# Altium PCB PCB_CONTROL.PcbDoc (part 11 of 15)
Units mil, origin at the board's own origin, x right, y up, seen from the top; angles counter-clockwise.
Board outline 7360.03 x 4773.15 mil, 2 copper layers (Top Layer, Bottom Layer); 73 components, 135 nets, 396 pads, 106 vias.
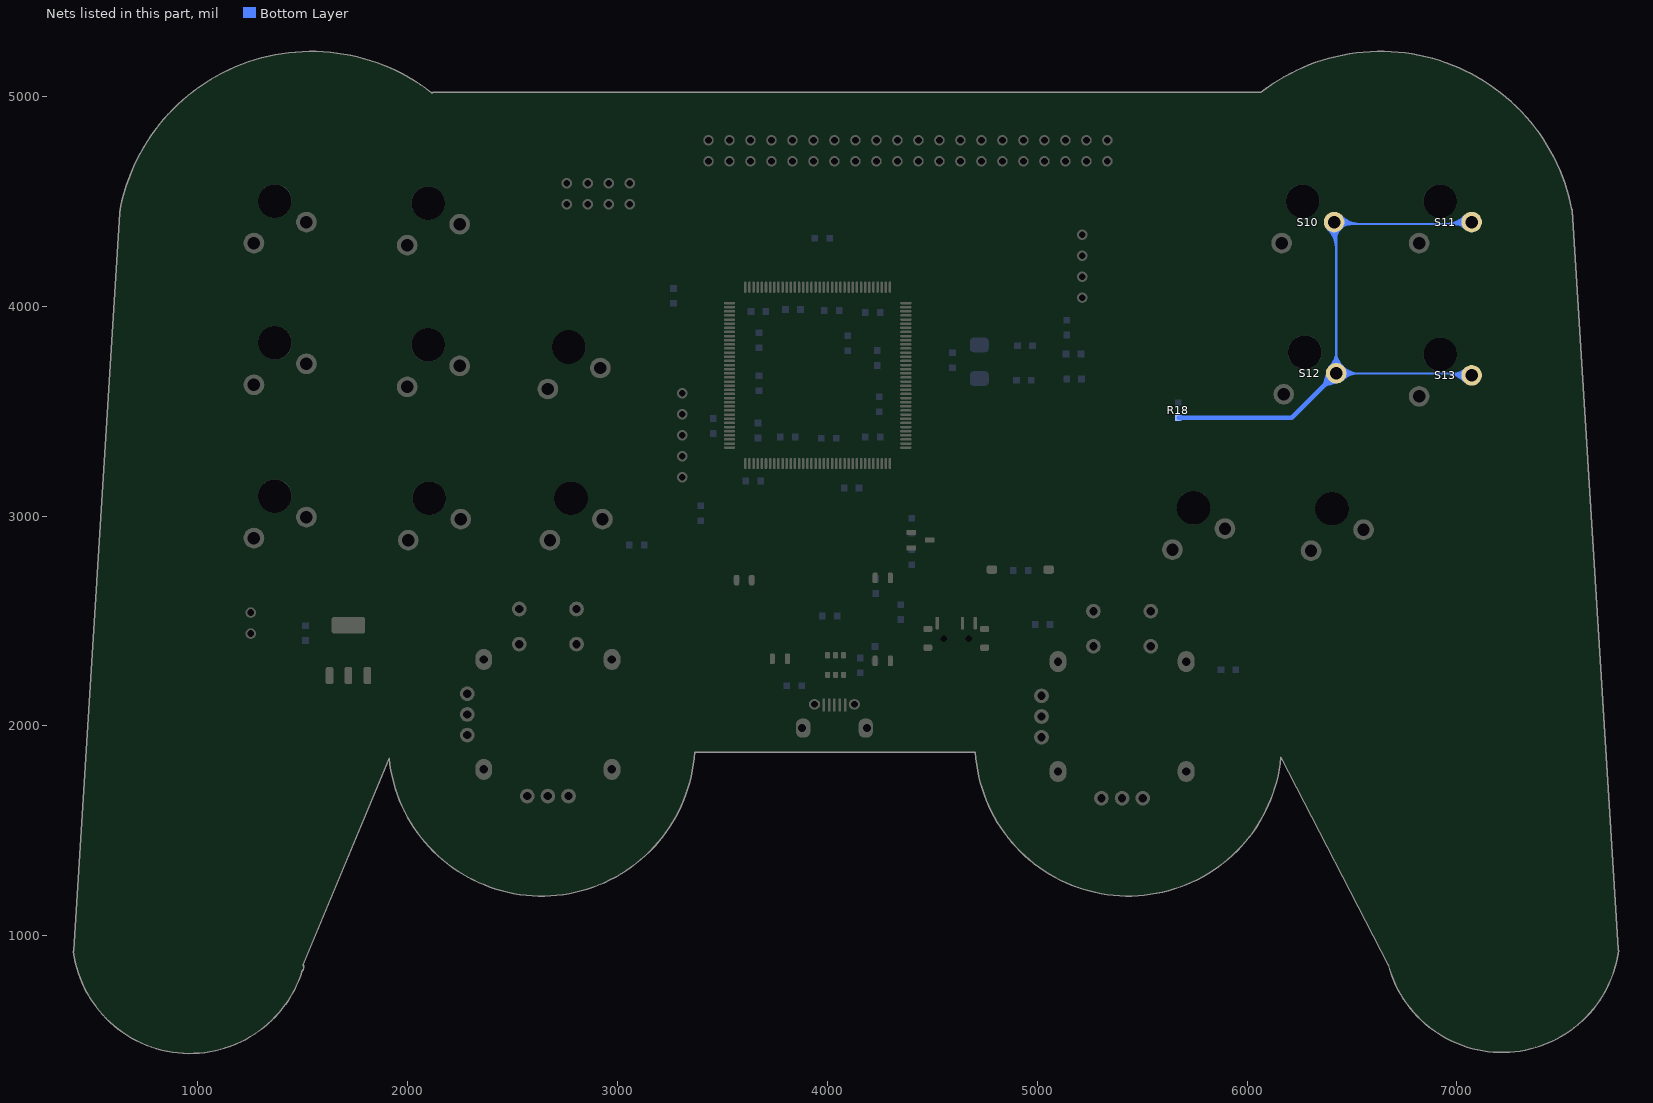
[diagram p11: the nets of this part, all layers, seen from the top]

## Via types
v1: diameter 20, hole 10, Top Layer to Bottom Layer, 104 vias
v2: diameter 30, hole 20, Top Layer to Bottom Layer, 2 vias

## Nets (pads, with @x,y where several pads share a name; then routed paths per layer and width w, separated by ;. In a path a pad name is that pad's centre, name@x,y a point inside that pad or via, vN(x,y) a via of type N, cw(c..) or ccw(c..) an arc to the next point about the centre after c; other vN are vias at no path point) (continued)
NetR18_1: R18.1 S10.1 S11.1 S12.1 S13.1 | length 30198
  Bottom Layer w10: R18.1@5680.78,3460.22 cw(c5699.56,3441.44) 5699.56,3468 cw(c5699.56,3494.56) R18.1@5680.78,3475.78 ; S12.1@6380.79,3680 cw(c6274.05,3680) 6349.52,3604.52 cw(c6425,3529.05) S12.1@6425,3635.79 ; S12.1@6390.79,3680 cw(c6308.19,3680) 6366.6,3621.6 cw(c6425,3563.19) S12.1@6425,3645.79 ; S12.1@6400.79,3680 cw(c6342.33,3680) 6383.67,3638.67 cw(c6425,3597.33) S12.1@6425,3655.79 ; S11.1@7060,4390 6425,4390 S12.1@6425,3680 6426,3679 S13.1@7061,3679 ; 6368.29,3633.34 cw(c6438.4,3614.56) S12.1@6423.84,3685.67 ; 6368.29,3633.34 cw(c6438.4,3614.56) S12.1@6423.84,3685.67 ; 6368.29,3633.34 cw(c6438.4,3614.56) S12.1@6423.84,3685.67 ; 6368.29,3633.34 cw(c6438.4,3614.56) S12.1@6423.84,3685.67 ; 6368.29,3633.34 cw(c6438.4,3614.56) S12.1@6423.84,3685.67 ; 6368.29,3633.34 cw(c6438.4,3614.56) S12.1@6423.84,3685.67 ; 6368.29,3633.34 cw(c6438.4,3614.56) S12.1@6423.84,3685.67 ; 6372.47,3648.98 cw(c6434.77,3632.28) S12.1@6421.83,3695.47 ; 6372.47,3648.98 cw(c6434.77,3632.28) S12.1@6421.83,3695.47 ; 6372.47,3648.98 cw(c6434.77,3632.28) S12.1@6421.83,3695.47 ; 6372.47,3648.98 cw(c6434.77,3632.28) S12.1@6421.83,3695.47 ; 6372.47,3648.98 cw(c6434.77,3632.28) S12.1@6421.83,3695.47 ; 6372.47,3648.98 cw(c6434.77,3632.28) S12.1@6421.83,3695.47 ; 6372.47,3648.98 cw(c6434.77,3632.28) S12.1@6421.83,3695.47 ; 6376.66,3664.61 cw(c6431.14,3650.01) S12.1@6419.83,3705.26 ; 6376.66,3664.61 cw(c6431.14,3650.01) S12.1@6419.83,3705.26 ; 6376.66,3664.61 cw(c6431.14,3650.01) S12.1@6419.83,3705.26 ; 6376.66,3664.61 cw(c6431.14,3650.01) S12.1@6419.83,3705.26 ; 6376.66,3664.61 cw(c6431.14,3650.01) S12.1@6419.83,3705.26 ; 6376.66,3664.61 cw(c6431.14,3650.01) S12.1@6419.83,3705.26 ; 6376.66,3664.61 cw(c6431.14,3650.01) S12.1@6419.83,3705.26 ; 6378.34,3623.29 ccw(c6359.56,3693.4) S12.1@6430.67,3678.84 ; 6378.34,3623.29 ccw(c6359.56,3693.4) S12.1@6430.67,3678.84 ; 6378.34,3623.29 ccw(c6359.56,3693.4) S12.1@6430.67,3678.84 ; 6378.34,3623.29 ccw(c6359.56,3693.4) S12.1@6430.67,3678.84 ; 6378.34,3623.29 ccw(c6359.56,3693.4) S12.1@6430.67,3678.84 ; 6378.34,3623.29 ccw(c6359.56,3693.4) S12.1@6430.67,3678.84 ; 6378.34,3623.29 ccw(c6359.56,3693.4) S12.1@6430.67,3678.84 ; S10.1@6383.74,4368.74 cw(c6284.12,4269.12) 6425,4269.12 ; S10.1@6383.74,4368.74 cw(c6284.12,4269.12) 6425,4269.12 ; S10.1@6383.74,4368.74 cw(c6284.12,4269.12) 6425,4269.12 ; S10.1@6383.74,4368.74 cw(c6284.12,4269.12) 6425,4269.12 ; S10.1@6383.74,4368.74 cw(c6284.12,4269.12) 6425,4269.12 ; S10.1@6383.74,4368.74 cw(c6284.12,4269.12) 6425,4269.12 ; S10.1@6383.74,4368.74 cw(c6284.12,4269.12) 6425,4269.12 ; S10.1@6383.74,4368.74 cw(c6284.12,4269.12) 6425,4269.12 ; S10.1@6390.81,4375.81 cw(c6308.26,4293.26) 6425,4293.26 ; S10.1@6390.81,4375.81 cw(c6308.26,4293.26) 6425,4293.26 ; S10.1@6390.81,4375.81 cw(c6308.26,4293.26) 6425,4293.26 ; S10.1@6390.81,4375.81 cw(c6308.26,4293.26) 6425,4293.26 ; S10.1@6390.81,4375.81 cw(c6308.26,4293.26) 6425,4293.26 ; S10.1@6390.81,4375.81 cw(c6308.26,4293.26) 6425,4293.26 ; S10.1@6390.81,4375.81 cw(c6308.26,4293.26) 6425,4293.26 ; S10.1@6390.81,4375.81 cw(c6308.26,4293.26) 6425,4293.26 ; S12.1@6393.74,3711.26 ccw(c6318.26,3786.74) 6425,3786.74 ; S12.1@6393.74,3711.26 ccw(c6318.26,3786.74) 6425,3786.74 ; S12.1@6393.74,3711.26 ccw(c6318.26,3786.74) 6425,3786.74 ; S12.1@6393.74,3711.26 ccw(c6318.26,3786.74) 6425,3786.74 ; S12.1@6393.74,3711.26 ccw(c6318.26,3786.74) 6425,3786.74 ; S12.1@6393.74,3711.26 ccw(c6318.26,3786.74) 6425,3786.74 ; S12.1@6393.74,3711.26 ccw(c6318.26,3786.74) 6425,3786.74 ; S12.1@6393.74,3711.26 ccw(c6318.26,3786.74) 6425,3786.74 ; 6393.98,3627.47 ccw(c6377.28,3689.77) S12.1@6440.47,3676.83 ; 6393.98,3627.47 ccw(c6377.28,3689.77) S12.1@6440.47,3676.83 ; 6393.98,3627.47 ccw(c6377.28,3689.77) S12.1@6440.47,3676.83 ; 6393.98,3627.47 ccw(c6377.28,3689.77) S12.1@6440.47,3676.83 ; 6393.98,3627.47 ccw(c6377.28,3689.77) S12.1@6440.47,3676.83 ; 6393.98,3627.47 ccw(c6377.28,3689.77) S12.1@6440.47,3676.83 ; 6393.98,3627.47 ccw(c6377.28,3689.77) S12.1@6440.47,3676.83 ; S10.1@6397.88,4382.88 cw(c6332.4,4317.4) 6425,4317.4 ; S10.1@6397.88,4382.88 cw(c6332.4,4317.4) 6425,4317.4 ; S10.1@6397.88,4382.88 cw(c6332.4,4317.4) 6425,4317.4 ; S10.1@6397.88,4382.88 cw(c6332.4,4317.4) 6425,4317.4 ; S10.1@6397.88,4382.88 cw(c6332.4,4317.4) 6425,4317.4 ; S10.1@6397.88,4382.88 cw(c6332.4,4317.4) 6425,4317.4 ; S10.1@6397.88,4382.88 cw(c6332.4,4317.4) 6425,4317.4 ; S10.1@6397.88,4382.88 cw(c6332.4,4317.4) 6425,4317.4 ; S12.1@6400.81,3704.19 ccw(c6342.4,3762.6) 6425,3762.6 ; S12.1@6400.81,3704.19 ccw(c6342.4,3762.6) 6425,3762.6 ; S12.1@6400.81,3704.19 ccw(c6342.4,3762.6) 6425,3762.6 ; S12.1@6400.81,3704.19 ccw(c6342.4,3762.6) 6425,3762.6 ; S12.1@6400.81,3704.19 ccw(c6342.4,3762.6) 6425,3762.6 ; S12.1@6400.81,3704.19 ccw(c6342.4,3762.6) 6425,3762.6 ; S12.1@6400.81,3704.19 ccw(c6342.4,3762.6) 6425,3762.6 ; S12.1@6400.81,3704.19 ccw(c6342.4,3762.6) 6425,3762.6 ; S10.1@6404.95,4389.95 cw(c6356.55,4341.55) 6425,4341.55 ; S10.1@6404.95,4389.95 cw(c6356.55,4341.55) 6425,4341.55 ; S10.1@6404.95,4389.95 cw(c6356.55,4341.55) 6425,4341.55 ; S10.1@6404.95,4389.95 cw(c6356.55,4341.55) 6425,4341.55 ; S10.1@6404.95,4389.95 cw(c6356.55,4341.55) 6425,4341.55 ; S10.1@6404.95,4389.95 cw(c6356.55,4341.55) 6425,4341.55 ; S10.1@6404.95,4389.95 cw(c6356.55,4341.55) 6425,4341.55 ; S10.1@6404.95,4389.95 cw(c6356.55,4341.55) 6425,4341.55 ; S12.1@6407.88,3697.12 ccw(c6366.55,3738.45) 6425,3738.45 ; S12.1@6407.88,3697.12 ccw(c6366.55,3738.45) 6425,3738.45 ; S12.1@6407.88,3697.12 ccw(c6366.55,3738.45) 6425,3738.45 ; S12.1@6407.88,3697.12 ccw(c6366.55,3738.45) 6425,3738.45 ; S12.1@6407.88,3697.12 ccw(c6366.55,3738.45) 6425,3738.45 ; S12.1@6407.88,3697.12 ccw(c6366.55,3738.45) 6425,3738.45 ; S12.1@6407.88,3697.12 ccw(c6366.55,3738.45) 6425,3738.45 ; S12.1@6407.88,3697.12 ccw(c6366.55,3738.45) 6425,3738.45 ; 6409.61,3631.66 ccw(c6395.01,3686.14) S12.1@6450.26,3674.83 ; 6409.61,3631.66 ccw(c6395.01,3686.14) S12.1@6450.26,3674.83 ; 6409.61,3631.66 ccw(c6395.01,3686.14) S12.1@6450.26,3674.83 ; 6409.61,3631.66 ccw(c6395.01,3686.14) S12.1@6450.26,3674.83 ; 6409.61,3631.66 ccw(c6395.01,3686.14) S12.1@6450.26,3674.83 ; 6409.61,3631.66 ccw(c6395.01,3686.14) S12.1@6450.26,3674.83 ; 6409.61,3631.66 ccw(c6395.01,3686.14) S12.1@6450.26,3674.83 ; 6425,3738.45 ccw(c6483.45,3738.45) S12.1@6442.12,3697.12 ; 6425,3738.45 ccw(c6483.45,3738.45) S12.1@6442.12,3697.12 ; 6425,3738.45 ccw(c6483.45,3738.45) S12.1@6442.12,3697.12 ; 6425,3738.45 ccw(c6483.45,3738.45) S12.1@6442.12,3697.12 ; 6425,3738.45 ccw(c6483.45,3738.45) S12.1@6442.12,3697.12 ; 6425,3738.45 ccw(c6483.45,3738.45) S12.1@6442.12,3697.12 ; 6425,3738.45 ccw(c6483.45,3738.45) S12.1@6442.12,3697.12 ; 6425,3738.45 ccw(c6483.45,3738.45) S12.1@6442.12,3697.12 ; 6425,3762.6 ccw(c6507.6,3762.6) S12.1@6449.19,3704.19 ; 6425,3762.6 ccw(c6507.6,3762.6) S12.1@6449.19,3704.19 ; 6425,3762.6 ccw(c6507.6,3762.6) S12.1@6449.19,3704.19 ; 6425,3762.6 ccw(c6507.6,3762.6) S12.1@6449.19,3704.19 ; 6425,3762.6 ccw(c6507.6,3762.6) S12.1@6449.19,3704.19 ; 6425,3762.6 ccw(c6507.6,3762.6) S12.1@6449.19,3704.19 ; 6425,3762.6 ccw(c6507.6,3762.6) S12.1@6449.19,3704.19 ; 6425,3762.6 ccw(c6507.6,3762.6) S12.1@6449.19,3704.19 ; 6425,3786.74 ccw(c6531.74,3786.74) S12.1@6456.26,3711.26 ; 6425,3786.74 ccw(c6531.74,3786.74) S12.1@6456.26,3711.26 ; 6425,3786.74 ccw(c6531.74,3786.74) S12.1@6456.26,3711.26 ; 6425,3786.74 ccw(c6531.74,3786.74) S12.1@6456.26,3711.26 ; 6425,3786.74 ccw(c6531.74,3786.74) S12.1@6456.26,3711.26 ; 6425,3786.74 ccw(c6531.74,3786.74) S12.1@6456.26,3711.26 ; 6425,3786.74 ccw(c6531.74,3786.74) S12.1@6456.26,3711.26 ; 6425,3786.74 ccw(c6531.74,3786.74) S12.1@6456.26,3711.26 ; 6425,4317.4 cw(c6497.6,4317.4) S10.1@6446.26,4368.74 ; 6425,4317.4 cw(c6497.6,4317.4) S10.1@6446.26,4368.74 ; 6425,4317.4 cw(c6497.6,4317.4) S10.1@6446.26,4368.74 ; 6425,4317.4 cw(c6497.6,4317.4) S10.1@6446.26,4368.74 ; 6425,4317.4 cw(c6497.6,4317.4) S10.1@6446.26,4368.74 ; 6425,4317.4 cw(c6497.6,4317.4) S10.1@6446.26,4368.74 ; 6425,4317.4 cw(c6497.6,4317.4) S10.1@6446.26,4368.74 ; 6425,4317.4 cw(c6497.6,4317.4) S10.1@6446.26,4368.74 ; 6425,4341.55 cw(c6473.45,4341.55) S10.1@6439.19,4375.81 ; 6425,4341.55 cw(c6473.45,4341.55) S10.1@6439.19,4375.81 ; 6425,4341.55 cw(c6473.45,4341.55) S10.1@6439.19,4375.81 ; 6425,4341.55 cw(c6473.45,4341.55) S10.1@6439.19,4375.81 ; 6425,4341.55 cw(c6473.45,4341.55) S10.1@6439.19,4375.81 ; 6425,4341.55 cw(c6473.45,4341.55) S10.1@6439.19,4375.81 ; 6425,4341.55 cw(c6473.45,4341.55) S10.1@6439.19,4375.81 ; 6425,4341.55 cw(c6473.45,4341.55) S10.1@6439.19,4375.81 ; S10.1@6425.05,4410.05 ccw(c6473.45,4458.45) 6473.45,4390 ; S10.1@6425.05,4410.05 ccw(c6473.45,4458.45) 6473.45,4390 ; S10.1@6425.05,4410.05 ccw(c6473.45,4458.45) 6473.45,4390 ; S10.1@6425.05,4410.05 ccw(c6473.45,4458.45) 6473.45,4390 ; S10.1@6425.05,4410.05 ccw(c6473.45,4458.45) 6473.45,4390 ; S10.1@6425.05,4410.05 ccw(c6473.45,4458.45) 6473.45,4390 ; S10.1@6425.05,4410.05 ccw(c6473.45,4458.45) 6473.45,4390 ; S10.1@6425.05,4410.05 ccw(c6473.45,4458.45) 6473.45,4390 ; S10.1@6432.12,4417.12 ccw(c6497.6,4482.6) 6497.6,4390 ; S10.1@6432.12,4417.12 ccw(c6497.6,4482.6) 6497.6,4390 ; S10.1@6432.12,4417.12 ccw(c6497.6,4482.6) 6497.6,4390 ; S10.1@6432.12,4417.12 ccw(c6497.6,4482.6) 6497.6,4390 ; S10.1@6432.12,4417.12 ccw(c6497.6,4482.6) 6497.6,4390 ; S10.1@6432.12,4417.12 ccw(c6497.6,4482.6) 6497.6,4390 ; S10.1@6432.12,4417.12 ccw(c6497.6,4482.6) 6497.6,4390 ; S10.1@6432.12,4417.12 ccw(c6497.6,4482.6) 6497.6,4390 ; S10.1@6439.19,4375.81 cw(c6473.45,4341.55) 6473.45,4390 ; S10.1@6439.19,4375.81 cw(c6473.45,4341.55) 6473.45,4390 ; S10.1@6439.19,4375.81 cw(c6473.45,4341.55) 6473.45,4390 ; S10.1@6439.19,4375.81 cw(c6473.45,4341.55) 6473.45,4390 ; S10.1@6439.19,4375.81 cw(c6473.45,4341.55) 6473.45,4390 ; S10.1@6439.19,4375.81 cw(c6473.45,4341.55) 6473.45,4390 ; S10.1@6439.19,4375.81 cw(c6473.45,4341.55) 6473.45,4390 ; S10.1@6439.19,4375.81 cw(c6473.45,4341.55) 6473.45,4390 ; S10.1@6439.19,4424.19 ccw(c6521.74,4506.74) 6521.74,4390 ; S10.1@6439.19,4424.19 ccw(c6521.74,4506.74) 6521.74,4390 ; S10.1@6439.19,4424.19 ccw(c6521.74,4506.74) 6521.74,4390 ; S10.1@6439.19,4424.19 ccw(c6521.74,4506.74) 6521.74,4390 ; S10.1@6439.19,4424.19 ccw(c6521.74,4506.74) 6521.74,4390 ; S10.1@6439.19,4424.19 ccw(c6521.74,4506.74) 6521.74,4390 ; S10.1@6439.19,4424.19 ccw(c6521.74,4506.74) 6521.74,4390 ; S10.1@6439.19,4424.19 ccw(c6521.74,4506.74) 6521.74,4390 ; S12.1@6442.12,3662.88 cw(c6481.04,3623.96) 6481.04,3679 ; S12.1@6442.12,3662.88 cw(c6481.04,3623.96) 6481.04,3679 ; S12.1@6442.12,3662.88 cw(c6481.04,3623.96) 6481.04,3679 ; S12.1@6442.12,3662.88 cw(c6481.04,3623.96) 6481.04,3679 ; S12.1@6442.12,3662.88 cw(c6481.04,3623.96) 6481.04,3679 ; S12.1@6442.12,3662.88 cw(c6481.04,3623.96) 6481.04,3679 ; S12.1@6442.12,3662.88 cw(c6481.04,3623.96) 6481.04,3679 ; S12.1@6442.12,3662.88 cw(c6481.04,3623.96) 6481.04,3679 ; S12.1@6442.12,3697.12 ccw(c6485.87,3740.87) 6485.87,3679 ; S12.1@6442.12,3697.12 ccw(c6485.87,3740.87) 6485.87,3679 ; S12.1@6442.12,3697.12 ccw(c6485.87,3740.87) 6485.87,3679 ; S12.1@6442.12,3697.12 ccw(c6485.87,3740.87) 6485.87,3679 ; S12.1@6442.12,3697.12 ccw(c6485.87,3740.87) 6485.87,3679 ; S12.1@6442.12,3697.12 ccw(c6485.87,3740.87) 6485.87,3679 ; S12.1@6442.12,3697.12 ccw(c6485.87,3740.87) 6485.87,3679 ; S12.1@6442.12,3697.12 ccw(c6485.87,3740.87) 6485.87,3679 ; S10.1@6446.26,4368.74 cw(c6497.6,4317.4) 6497.6,4390 ; S10.1@6446.26,4368.74 cw(c6497.6,4317.4) 6497.6,4390 ; S10.1@6446.26,4368.74 cw(c6497.6,4317.4) 6497.6,4390 ; S10.1@6446.26,4368.74 cw(c6497.6,4317.4) 6497.6,4390 ; S10.1@6446.26,4368.74 cw(c6497.6,4317.4) 6497.6,4390 ; S10.1@6446.26,4368.74 cw(c6497.6,4317.4) 6497.6,4390 ; S10.1@6446.26,4368.74 cw(c6497.6,4317.4) 6497.6,4390 ; S10.1@6446.26,4368.74 cw(c6497.6,4317.4) 6497.6,4390 ; S10.1@6446.26,4431.26 ccw(c6545.88,4530.88) 6545.88,4390 ; S10.1@6446.26,4431.26 ccw(c6545.88,4530.88) 6545.88,4390 ; S10.1@6446.26,4431.26 ccw(c6545.88,4530.88) 6545.88,4390 ; S10.1@6446.26,4431.26 ccw(c6545.88,4530.88) 6545.88,4390 ; S10.1@6446.26,4431.26 ccw(c6545.88,4530.88) 6545.88,4390 ; S10.1@6446.26,4431.26 ccw(c6545.88,4530.88) 6545.88,4390 ; S10.1@6446.26,4431.26 ccw(c6545.88,4530.88) 6545.88,4390 ; S10.1@6446.26,4431.26 ccw(c6545.88,4530.88) 6545.88,4390 ; S12.1@6449.19,3655.81 cw(c6505.18,3599.82) 6505.18,3679 ; S12.1@6449.19,3655.81 cw(c6505.18,3599.82) 6505.18,3679 ; S12.1@6449.19,3655.81 cw(c6505.18,3599.82) 6505.18,3679 ; S12.1@6449.19,3655.81 cw(c6505.18,3599.82) 6505.18,3679 ; S12.1@6449.19,3655.81 cw(c6505.18,3599.82) 6505.18,3679 ; S12.1@6449.19,3655.81 cw(c6505.18,3599.82) 6505.18,3679 ; S12.1@6449.19,3655.81 cw(c6505.18,3599.82) 6505.18,3679 ; S12.1@6449.19,3655.81 cw(c6505.18,3599.82) 6505.18,3679 ; S12.1@6449.19,3704.19 ccw(c6510.01,3765.01) 6510.01,3679 ; S12.1@6449.19,3704.19 ccw(c6510.01,3765.01) 6510.01,3679 ; S12.1@6449.19,3704.19 ccw(c6510.01,3765.01) 6510.01,3679 ; S12.1@6449.19,3704.19 ccw(c6510.01,3765.01) 6510.01,3679 ; S12.1@6449.19,3704.19 ccw(c6510.01,3765.01) 6510.01,3679 ; S12.1@6449.19,3704.19 ccw(c6510.01,3765.01) 6510.01,3679 ; S12.1@6449.19,3704.19 ccw(c6510.01,3765.01) 6510.01,3679 ; S12.1@6449.19,3704.19 ccw(c6510.01,3765.01) 6510.01,3679 ; S12.1@6456.26,3648.74 cw(c6529.32,3575.68) 6529.32,3679 ; S12.1@6456.26,3648.74 cw(c6529.32,3575.68) 6529.32,3679 ; S12.1@6456.26,3648.74 cw(c6529.32,3575.68) 6529.32,3679 ; S12.1@6456.26,3648.74 cw(c6529.32,3575.68) 6529.32,3679 ; S12.1@6456.26,3648.74 cw(c6529.32,3575.68) 6529.32,3679 ; S12.1@6456.26,3648.74 cw(c6529.32,3575.68) 6529.32,3679 ; S12.1@6456.26,3648.74 cw(c6529.32,3575.68) 6529.32,3679 ; S12.1@6456.26,3648.74 cw(c6529.32,3575.68) 6529.32,3679 ; S12.1@6456.26,3711.26 ccw(c6534.15,3789.15) 6534.15,3679 ; S12.1@6456.26,3711.26 ccw(c6534.15,3789.15) 6534.15,3679 ; S12.1@6456.26,3711.26 ccw(c6534.15,3789.15) 6534.15,3679 ; S12.1@6456.26,3711.26 ccw(c6534.15,3789.15) 6534.15,3679 ; S12.1@6456.26,3711.26 ccw(c6534.15,3789.15) 6534.15,3679 ; S12.1@6456.26,3711.26 ccw(c6534.15,3789.15) 6534.15,3679 ; S12.1@6456.26,3711.26 ccw(c6534.15,3789.15) 6534.15,3679 ; S12.1@6456.26,3711.26 ccw(c6534.15,3789.15) 6534.15,3679 ; 6939.12,4390 ccw(c6939.12,4530.88) S11.1@7038.74,4431.26 ; 6939.12,4390 ccw(c6939.12,4530.88) S11.1@7038.74,4431.26 ; 6939.12,4390 ccw(c6939.12,4530.88) S11.1@7038.74,4431.26 ; 6939.12,4390 ccw(c6939.12,4530.88) S11.1@7038.74,4431.26 ; 6939.12,4390 ccw(c6939.12,4530.88) S11.1@7038.74,4431.26 ; 6939.12,4390 ccw(c6939.12,4530.88) S11.1@7038.74,4431.26 ; 6939.12,4390 ccw(c6939.12,4530.88) S11.1@7038.74,4431.26 ; 6939.12,4390 ccw(c6939.12,4530.88) S11.1@7038.74,4431.26 ; 6941.53,3679 cw(c6941.53,3541.53) S13.1@7038.74,3638.74 ; 6941.53,3679 cw(c6941.53,3541.53) S13.1@7038.74,3638.74 ; 6941.53,3679 cw(c6941.53,3541.53) S13.1@7038.74,3638.74 ; 6941.53,3679 cw(c6941.53,3541.53) S13.1@7038.74,3638.74 ; 6941.53,3679 cw(c6941.53,3541.53) S13.1@7038.74,3638.74 ; 6941.53,3679 cw(c6941.53,3541.53) S13.1@7038.74,3638.74 ; 6941.53,3679 cw(c6941.53,3541.53) S13.1@7038.74,3638.74 ; 6941.53,3679 cw(c6941.53,3541.53) S13.1@7038.74,3638.74 ; 6963.26,4390 ccw(c6963.26,4506.74) S11.1@7045.81,4424.19 ; 6963.26,4390 ccw(c6963.26,4506.74) S11.1@7045.81,4424.19 ; 6963.26,4390 ccw(c6963.26,4506.74) S11.1@7045.81,4424.19 ; 6963.26,4390 ccw(c6963.26,4506.74) S11.1@7045.81,4424.19 ; 6963.26,4390 ccw(c6963.26,4506.74) S11.1@7045.81,4424.19 ; 6963.26,4390 ccw(c6963.26,4506.74) S11.1@7045.81,4424.19 ; 6963.26,4390 ccw(c6963.26,4506.74) S11.1@7045.81,4424.19 ; 6963.26,4390 ccw(c6963.26,4506.74) S11.1@7045.81,4424.19 ; 6965.68,3679 cw(c6965.68,3565.68) S13.1@7045.81,3645.81 ; 6965.68,3679 cw(c6965.68,3565.68) S13.1@7045.81,3645.81 ; 6965.68,3679 cw(c6965.68,3565.68) S13.1@7045.81,3645.81 ; 6965.68,3679 cw(c6965.68,3565.68) S13.1@7045.81,3645.81 ; 6965.68,3679 cw(c6965.68,3565.68) S13.1@7045.81,3645.81 ; 6965.68,3679 cw(c6965.68,3565.68) S13.1@7045.81,3645.81 ; 6965.68,3679 cw(c6965.68,3565.68) S13.1@7045.81,3645.81 ; 6965.68,3679 cw(c6965.68,3565.68) S13.1@7045.81,3645.81 ; 6984.99,3679 ccw(c6984.99,3755.01) S13.1@7038.74,3701.26 ; 6984.99,3679 ccw(c6984.99,3755.01) S13.1@7038.74,3701.26 ; 6984.99,3679 ccw(c6984.99,3755.01) S13.1@7038.74,3701.26 ; 6984.99,3679 ccw(c6984.99,3755.01) S13.1@7038.74,3701.26 ; 6984.99,3679 ccw(c6984.99,3755.01) S13.1@7038.74,3701.26 ; 6984.99,3679 ccw(c6984.99,3755.01) S13.1@7038.74,3701.26 ; 6984.99,3679 ccw(c6984.99,3755.01) S13.1@7038.74,3701.26 ; 6984.99,3679 ccw(c6984.99,3755.01) S13.1@7038.74,3701.26 ; 6987.4,4390 cw(c6987.4,4317.4) S11.1@7038.74,4368.74 ; 6987.4,4390 ccw(c6987.4,4482.6) S11.1@7052.88,4417.12 ; 6987.4,4390 ccw(c6987.4,4482.6) S11.1@7052.88,4417.12 ; 6987.4,4390 cw(c6987.4,4317.4) S11.1@7038.74,4368.74 ; 6987.4,4390 ccw(c6987.4,4482.6) S11.1@7052.88,4417.12 ; 6987.4,4390 cw(c6987.4,4317.4) S11.1@7038.74,4368.74 ; 6987.4,4390 ccw(c6987.4,4482.6) S11.1@7052.88,4417.12 ; 6987.4,4390 cw(c6987.4,4317.4) S11.1@7038.74,4368.74 ; 6987.4,4390 ccw(c6987.4,4482.6) S11.1@7052.88,4417.12 ; 6987.4,4390 cw(c6987.4,4317.4) S11.1@7038.74,4368.74 ; 6987.4,4390 ccw(c6987.4,4482.6) S11.1@7052.88,4417.12 ; 6987.4,4390 cw(c6987.4,4317.4) S11.1@7038.74,4368.74 ; 6987.4,4390 ccw(c6987.4,4482.6) S11.1@7052.88,4417.12 ; 6987.4,4390 cw(c6987.4,4317.4) S11.1@7038.74,4368.74 ; 6987.4,4390 ccw(c6987.4,4482.6) S11.1@7052.88,4417.12 ; 6987.4,4390 cw(c6987.4,4317.4) S11.1@7038.74,4368.74 ; 6989.82,3679 cw(c6989.82,3589.82) S13.1@7052.88,3652.88 ; 6989.82,3679 cw(c6989.82,3589.82) S13.1@7052.88,3652.88 ; 6989.82,3679 cw(c6989.82,3589.82) S13.1@7052.88,3652.88 ; 6989.82,3679 cw(c6989.82,3589.82) S13.1@7052.88,3652.88 ; 6989.82,3679 cw(c6989.82,3589.82) S13.1@7052.88,3652.88 ; 6989.82,3679 cw(c6989.82,3589.82) S13.1@7052.88,3652.88 ; 6989.82,3679 cw(c6989.82,3589.82) S13.1@7052.88,3652.88 ; 6989.82,3679 cw(c6989.82,3589.82) S13.1@7052.88,3652.88 ; 7009.13,3679 ccw(c7009.13,3730.87) S13.1@7045.81,3694.19 ; 7009.13,3679 ccw(c7009.13,3730.87) S13.1@7045.81,3694.19 ; 7009.13,3679 ccw(c7009.13,3730.87) S13.1@7045.81,3694.19 ; 7009.13,3679 ccw(c7009.13,3730.87) S13.1@7045.81,3694.19 ; 7009.13,3679 ccw(c7009.13,3730.87) S13.1@7045.81,3694.19 ; 7009.13,3679 ccw(c7009.13,3730.87) S13.1@7045.81,3694.19 ; 7009.13,3679 ccw(c7009.13,3730.87) S13.1@7045.81,3694.19 ; 7009.13,3679 ccw(c7009.13,3730.87) S13.1@7045.81,3694.19 ; 7011.55,4390 cw(c7011.55,4341.55) S11.1@7045.81,4375.81 ; 7011.55,4390 ccw(c7011.55,4458.45) S11.1@7059.95,4410.05 ; 7011.55,4390 ccw(c7011.55,4458.45) S11.1@7059.95,4410.05 ; 7011.55,4390 cw(c7011.55,4341.55) S11.1@7045.81,4375.81 ; 7011.55,4390 ccw(c7011.55,4458.45) S11.1@7059.95,4410.05 ; 7011.55,4390 cw(c7011.55,4341.55) S11.1@7045.81,4375.81 ; 7011.55,4390 ccw(c7011.55,4458.45) S11.1@7059.95,4410.05 ; 7011.55,4390 cw(c7011.55,4341.55) S11.1@7045.81,4375.81 ; 7011.55,4390 ccw(c7011.55,4458.45) S11.1@7059.95,4410.05 ; 7011.55,4390 cw(c7011.55,4341.55) S11.1@7045.81,4375.81 ; 7011.55,4390 ccw(c7011.55,4458.45) S11.1@7059.95,4410.05 ; 7011.55,4390 cw(c7011.55,4341.55) S11.1@7045.81,4375.81 ; 7011.55,4390 ccw(c7011.55,4458.45) S11.1@7059.95,4410.05 ; 7011.55,4390 cw(c7011.55,4341.55) S11.1@7045.81,4375.81 ; 7011.55,4390 ccw(c7011.55,4458.45) S11.1@7059.95,4410.05 ; 7011.55,4390 cw(c7011.55,4341.55) S11.1@7045.81,4375.81 ; 7013.96,3679 cw(c7013.96,3613.96) S13.1@7059.95,3659.95 ; 7013.96,3679 cw(c7013.96,3613.96) S13.1@7059.95,3659.95 ; 7013.96,3679 cw(c7013.96,3613.96) S13.1@7059.95,3659.95 ; 7013.96,3679 cw(c7013.96,3613.96) S13.1@7059.95,3659.95 ; 7013.96,3679 cw(c7013.96,3613.96) S13.1@7059.95,3659.95 ; 7013.96,3679 cw(c7013.96,3613.96) S13.1@7059.95,3659.95 ; 7013.96,3679 cw(c7013.96,3613.96) S13.1@7059.95,3659.95 ; 7013.96,3679 cw(c7013.96,3613.96) S13.1@7059.95,3659.95
  Bottom Layer w20: R18.1@5673,3468 6213,3468 S12.1@6425,3680 ; 6358.06,3613.06 cw(c6425,3546.12) S12.1@6425,3640.79 ; 6358.06,3613.06 ccw(c6291.12,3680) S12.1@6385.79,3680 ; 6358.06,3613.06 ccw(c6291.12,3680) S12.1@6385.79,3680 ; 6358.06,3613.06 cw(c6425,3546.12) S12.1@6425,3640.79 ; 6358.06,3613.06 ccw(c6291.12,3680) S12.1@6385.79,3680 ; 6358.06,3613.06 cw(c6425,3546.12) S12.1@6425,3640.79 ; 6358.06,3613.06 ccw(c6291.12,3680) S12.1@6385.79,3680 ; 6358.06,3613.06 cw(c6425,3546.12) S12.1@6425,3640.79 ; 6358.06,3613.06 ccw(c6291.12,3680) S12.1@6385.79,3680 ; 6358.06,3613.06 cw(c6425,3546.12) S12.1@6425,3640.79 ; 6358.06,3613.06 ccw(c6291.12,3680) S12.1@6385.79,3680 ; 6358.06,3613.06 cw(c6425,3546.12) S12.1@6425,3640.79 ; 6358.06,3613.06 ccw(c6291.12,3680) S12.1@6385.79,3680 ; 6358.06,3613.06 cw(c6425,3546.12) S12.1@6425,3640.79 ; 6372.88,3631.83 cw(c6438.46,3614.25) S12.1@6424.84,3680.77 ; 6372.88,3631.83 cw(c6438.46,3614.25) S12.1@6424.84,3680.77 ; 6372.88,3631.83 cw(c6438.46,3614.25) S12.1@6424.84,3680.77 ; 6372.88,3631.83 cw(c6438.46,3614.25) S12.1@6424.84,3680.77 ; 6372.88,3631.83 cw(c6438.46,3614.25) S12.1@6424.84,3680.77 ; 6372.88,3631.83 cw(c6438.46,3614.25) S12.1@6424.84,3680.77 ; 6372.88,3631.83 cw(c6438.46,3614.25) S12.1@6424.84,3680.77 ; 6372.88,3631.83 cw(c6438.46,3614.25) S12.1@6424.84,3680.77 ; 6372.88,3631.83 cw(c6438.46,3614.25) S12.1@6424.84,3680.77 ; 6372.88,3631.83 cw(c6438.46,3614.25) S12.1@6424.84,3680.77 ; 6372.88,3631.83 cw(c6438.46,3614.25) S12.1@6424.84,3680.77 ; 6372.88,3631.83 cw(c6438.46,3614.25) S12.1@6424.84,3680.77 ; 6372.88,3631.83 cw(c6438.46,3614.25) S12.1@6424.84,3680.77 ; 6372.88,3631.83 cw(c6438.46,3614.25) S12.1@6424.84,3680.77 ; 6372.88,3631.83 cw(c6438.46,3614.25) S12.1@6424.84,3680.77 ; 6372.88,3631.83 cw(c6438.46,3614.25) S12.1@6424.84,3680.77 ; 6372.88,3631.83 cw(c6438.46,3614.25) S12.1@6424.84,3680.77 ; 6372.88,3631.83 cw(c6438.46,3614.25) S12.1@6424.84,3680.77 ; 6372.88,3631.83 cw(c6438.46,3614.25) S12.1@6424.84,3680.77 ; 6372.88,3631.83 cw(c6438.46,3614.25) S12.1@6424.84,3680.77 ; 6372.88,3631.83 cw(c6438.46,3614.25) S12.1@6424.84,3680.77 ; 6376.83,3627.88 ccw(c6359.25,3693.46) S12.1@6425.77,3679.84 ; 6376.83,3627.88 ccw(c6359.25,3693.46) S12.1@6425.77,3679.84 ; 6376.83,3627.88 ccw(c6359.25,3693.46) S12.1@6425.77,3679.84 ; 6376.83,3627.88 ccw(c6359.25,3693.46) S12.1@6425.77,3679.84 ; 6376.83,3627.88 ccw(c6359.25,3693.46) S12.1@6425.77,3679.84 ; 6376.83,3627.88 ccw(c6359.25,3693.46) S12.1@6425.77,3679.84 ; 6376.83,3627.88 ccw(c6359.25,3693.46) S12.1@6425.77,3679.84 ; 6376.83,3627.88 ccw(c6359.25,3693.46) S12.1@6425.77,3679.84 ; 6376.83,3627.88 ccw(c6359.25,3693.46) S12.1@6425.77,3679.84 ; 6376.83,3627.88 ccw(c6359.25,3693.46) S12.1@6425.77,3679.84 ; 6376.83,3627.88 ccw(c6359.25,3693.46) S12.1@6425.77,3679.84 ; 6376.83,3627.88 ccw(c6359.25,3693.46) S12.1@6425.77,3679.84 ; 6376.83,3627.88 ccw(c6359.25,3693.46) S12.1@6425.77,3679.84 ; 6376.83,3627.88 ccw(c6359.25,3693.46) S12.1@6425.77,3679.84 ; 6376.83,3627.88 ccw(c6359.25,3693.46) S12.1@6425.77,3679.84 ; 6376.83,3627.88 ccw(c6359.25,3693.46) S12.1@6425.77,3679.84 ; 6376.83,3627.88 ccw(c6359.25,3693.46) S12.1@6425.77,3679.84 ; 6376.83,3627.88 ccw(c6359.25,3693.46) S12.1@6425.77,3679.84 ; 6376.83,3627.88 ccw(c6359.25,3693.46) S12.1@6425.77,3679.84 ; 6376.83,3627.88 ccw(c6359.25,3693.46) S12.1@6425.77,3679.84 ; 6376.83,3627.88 ccw(c6359.25,3693.46) S12.1@6425.77,3679.84